# Altium PCB watch_1v1_connector_breakout.PcbDoc
Units mil, origin at the board's own origin, x right, y up, seen from the top; angles counter-clockwise.
Board outline 1050 x 445 mil, 2 copper layers (Top Layer, Bottom Layer); 4 components, 11 nets, 52 pads, 11 vias.
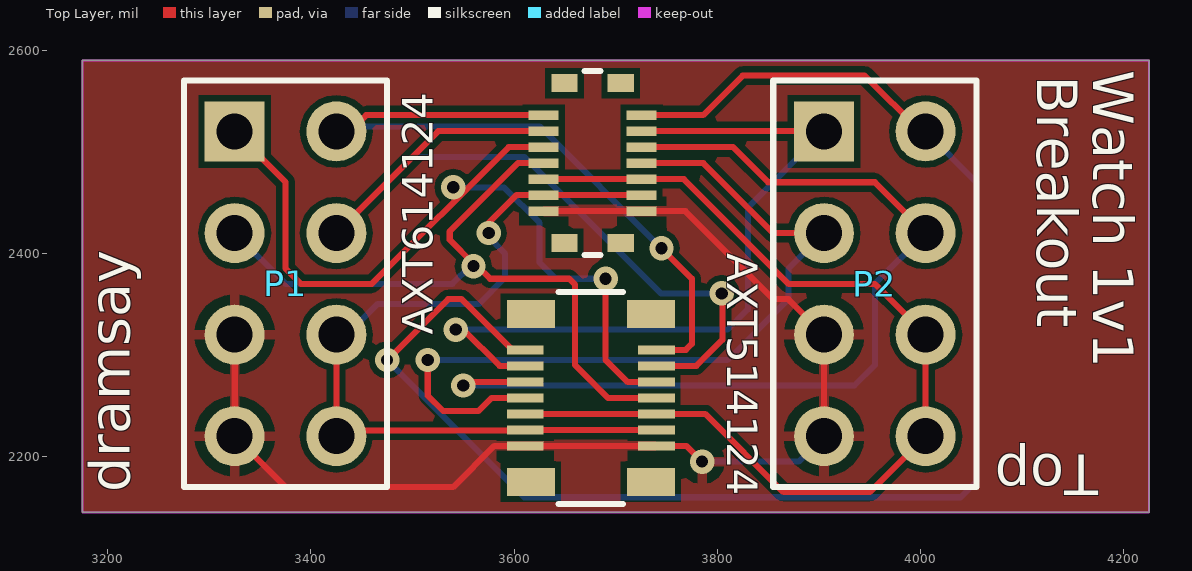
[diagram p0: Top Layer view]
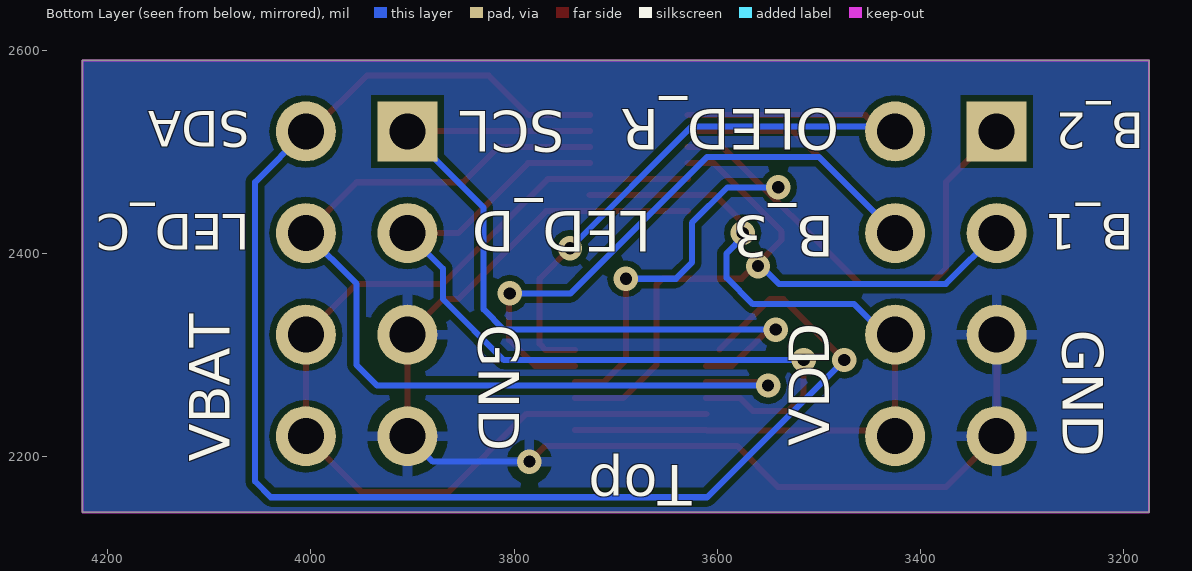
[diagram p1: Bottom Layer view, seen from below]

## Layer stack, top to bottom
Top Solder: solder mask 0.4, Solder Resist, Dk 3.5
Top Layer: signal copper 1.4
Dielectric 1: dielectric 12.6, FR-4, Dk 4.8
Bottom Layer: signal copper 1.4
Bottom Solder: solder mask 0.4, Solder Resist, Dk 3.5

## Board outline
4225,2590 3175,2590 3175,2145 4225,2145

## Design rules (kind name [scope] priority, off if disabled: settings)
Clearance [All] p1: gap=6 ignorepadtopadclearanceinfootprint=FALSE except(0: Arc-Hole Track-Hole SMDPad-Hole THPad-Hole Via-Hole Fill-Hole Poly-Hole Region-Hole Text-Hole)
PolygonConnect [All] p1: connectstyle=Relief reliefconductorwidth=10 reliefentries=4 polygonreliefangle="90 Angle" airgapwidth=10
RoutingVias [All] p1: holewidth=28 width=50 viastyle="Through Hole" minholewidth=28 minwidth=50 maxholewidth=28 maxwidth=50
SolderMaskExpansion [All] p1: expansion=4 istentingtop=FALSE
Width [All] p1: maxlimit=10 minlimit=6 preferedwidth=6 minimp=50.000000 maximp=50.000000 favimp=50.000000
30 further rules are at their usual default settings.

## Components (designator, comment, footprint, x,y, rotation, side; value= is the part's Value field where it differs from the comment)
AXT514124 "AXT514124" AXT514124 3675.43,2257.76 r270 top
AXT614124 "AXT614124" AXT614124 3677.32,2488.74 r90 top
P1 "Header 4X2" HDR2X4 3325,2520 r270 top
P2 "Header 4X2" HDR2X4 3905,2520 r270 top

## Footprints (in the part's own frame and the unit in brackets; to place one, negate y for a bottom-side part, rotate by r counter-clockwise, add the part's x,y. Pads: shape width x height; smd on the part's side, far side on the other; paste and mask are expansions set on the pad)
AXT514124 [mm]
  rect 0.23x0.92 smd: 1(-1.2,-1.64) 2(-1.2,1.64) 3(-0.8,-1.64) 4(-0.8,1.64) 5(-0.4,-1.64) 6(-0.4,1.64) 7(0,-1.64) 8(0,1.64) 9(0.4,-1.64) 10(0.4,1.64) 11(0.8,-1.64) 12(0.8,1.64) 13(1.2,-1.64) 14(1.2,1.64)
  rect 0.7x1.2 smd: MP1(-2.1,-1.5) MP2(-2.1,1.5) MP3(2.1,-1.5) MP4(2.1,1.5)
  silkscreen extent -2.65,-0.8 2.65,0.8, body extent -2.65,-2.08 2.65,2.08, height 1.27
AXT614124 [mm]
  rect 0.23x0.75 smd: 1(-1.2,-1.225) 2(-1.2,1.225) 3(-0.8,-1.225) 4(-0.8,1.225) 5(-0.4,-1.225) 6(-0.4,1.225) 7(0,-1.225) 8(0,1.225) 9(0.4,-1.225) 10(0.4,1.225) 11(0.8,-1.225) 12(0.8,1.225) 13(1.2,-1.225) 14(1.2,1.225)
  rect 0.45x0.655 smd: MP1(-2,-0.703) MP2(-2,0.703) MP3(2,-0.703) MP4(2,0.703)
  silkscreen extent -2.3,-0.2 2.3,0.2, body extent -2.3,-1.58 2.3,1.58, height 1.13
HDR2X4 [mm] "Connector; Header; 4x2 Position"
  rect 1.5x1.5 hole 0.9: 1(0,0)
  round 1.5 hole 0.9: 2(0,2.54) 3(2.54,0) 4(2.54,2.54) 5(5.08,0) 6(5.08,2.54) 7(7.62,0) 8(7.62,2.54)
  silkscreen extent -1.27,-1.27 8.89,3.81

## Part data
AXT514124: "Connector", Manufacturer_Name=Panasonic, Mouser Part Number=769-AXT514124, Datasheet Link=https://componentsearchengine.com/Datasheets/1/AXT514124.pdf, Height=1.17mm, Manufacturer_Part_Number=AXT514124, Mouser Price/Stock=https://www.mouser.com/Search/Refine.aspx?Keyword=769-AXT514124
AXT614124: "Connector", Manufacturer_Name=Panasonic, Mouser Part Number=769-AXT614124, Datasheet Link=https://componentsearchengine.com/Datasheets/1/AXT614124.pdf, Height=1.03mm, Manufacturer_Part_Number=AXT614124, Mouser Price/Stock=https://www.mouser.com/Search/Refine.aspx?Keyword=769-AXT614124
P1 P2: "Header, 4-Pin, Dual row", LatestRevisionDate=17-Jul-2002, LatestRevisionNote="Re-released for DXP Platform.", Publisher="Altium Limited"

## Via types
v1: diameter 24, hole 12, Top Layer to Bottom Layer, tented both sides, 11 vias

## Nets (pads, with @x,y where several pads share a name; then routed paths per layer and width w, separated by ;. In a path a pad name is that pad's centre, name@x,y a point inside that pad or via, vN(x,y) a via of type N, cw(c..) or ccw(c..) an arc to the next point about the centre after c; other vN are vias at no path point)
BTN1: AXT514124.8 AXT614124.8 P1.3 | length 707.1
  Top Layer w6: AXT614124.8 3603.74,2488.74 3536.64,2421.64 3536.64,2413.36 3560,2390 v1(3560,2387.5) 3563.79,2387.5 3576.29,2375 3654.14,2375 3660,2369.14 3660,2290 3692.24,2257.76 AXT514124.8
  Bottom Layer w6: P1.3 3375,2370 3539.32,2370 3556.82,2387.5 v1(3560,2387.5)
BTN2: AXT514124.6 AXT614124.10 P1.1 | length 820.8
  Top Layer w6: P1.1 3375,2470 3375,2385 3390,2370 3460,2370 3594.49,2504.49 AXT614124.10 ; v1(3690,2375) 3690,2295 3711.5,2273.5 AXT514124.6
  Bottom Layer w6: v1(3540,2465) 3590,2465 3625,2430 3625,2390.86 3640.86,2375 v1(3690,2375)
BTN3: AXT514124.4 AXT614124.12 P1.4 | length 833.3
  Top Layer w6: P1.4 3525.24,2520.24 AXT614124.12 ; AXT514124.4 3779.25,2289.25 3805,2315 3805,2360 v1(3804.38,2360.62)
  Bottom Layer w6: P1.4 3500,2495 3610,2495 3744.38,2360.62 v1(3804.38,2360.62)
GND: AXT514124.13 AXT514124.14 AXT614124.1 AXT614124.2 P1.5 P1.7 P2.5 P2.7 | length 1160.5
  Top Layer w6: P1.5 P1.7 3375,2170 3540,2170 3580.51,2210.51 AXT514124.13 AXT514124.14 3769.49,2210.51 v1(3785,2195) ; AXT614124.2 AXT614124.1 3768.5,2441.5 3855,2355 3870,2355 P2.5 P2.7
  Bottom Layer w6: v1(3785,2195) 3880,2195 P2.7
I2C_SCL: AXT514124.3 AXT614124.11 P2.1 | length 764.6
  Top Layer w6: v1(3542.5,2325) 3550,2325 3585.75,2289.25 AXT514124.3 ; AXT614124.11 3904.76,2520.24 P2.1
  Bottom Layer w6: v1(3542.5,2325) 3810,2325 3830,2345 3830,2445 P2.1
I2C_SDA: AXT514124.1 AXT614124.13 P2.2 | length 1494.1
  Top Layer w6: v1(3475,2295) 3535,2355 3548.23,2355 AXT514124.1@3597.76,2305.47 ; AXT614124.13 3785.98,2535.98 3825,2575 3945,2575 4000,2520 P2.2
  Bottom Layer w6: v1(3475,2295) 3610,2160 4039.54,2160 4055,2175.46 4055,2470 P2.2
LED_CLK: AXT514124.5 AXT614124.9 P2.4 | length 940.8
  Top Layer w6: v1(3550,2270) 3553.79,2270 3557.29,2273.5 AXT514124.5 ; AXT614124.9 3815.51,2504.49 3850,2470 3955,2470 P2.4
  Bottom Layer w6: v1(3550,2270) 3935,2270 3955,2290 3955,2370 P2.4
LED_DATA: AXT514124.7 AXT614124.7 P2.3 | length 809.6
  Top Layer w6: v1(3515,2295) 3515,2260 3530,2245 3565,2245 3577.76,2257.76 AXT514124.7 ; AXT614124.7 3786.26,2488.74 3855,2420 P2.3
  Bottom Layer w6: v1(3515,2295) 3810,2295 3870,2355 3870,2385 P2.3
OLED_RST: AXT514124.2 AXT614124.14 P1.2 | length 726.5
  Top Layer w6: P1.2 3438.27,2520 3454.26,2535.98 AXT614124.14 ; AXT514124.2 3769.14,2305 3775,2310.86 3775,2375 v1(3745,2405)
  Bottom Layer w6: P1.2 3430,2525 3625,2525 v1(3745,2405)
VBAT: AXT514124.9 AXT514124.10 AXT614124.5 AXT614124.6 P2.6 P2.8 | length 988.1
  Top Layer w6: AXT514124.9 AXT514124.10 3787.99,2242.01 3865,2165 3950,2165 P2.8 P2.6 3955,2370 3870,2370 3767.01,2472.99 AXT614124.5 AXT614124.6
VDD: AXT514124.11 AXT514124.12 AXT614124.3 AXT614124.4 P1.6 P1.8 | length 829.1
  Top Layer w6: P1.6 P1.8 3430.79,2225.79 3610.39,2225.79 AXT514124.11 AXT514124.12 ; v1(3575,2420) 3575,2430 3602.24,2457.24 AXT614124.4 AXT614124.3
  Bottom Layer w6: P1.6 3435.39,2320 3465.39,2350 3565,2350 3590.86,2375.86 3590.86,2400 3582,2408.86 3582,2409.21 3575,2416.21 v1(3575,2420)
pads on no net: AXT514124.MP1 AXT514124.MP2 AXT514124.MP3 AXT514124.MP4 AXT614124.MP1 AXT614124.MP2 AXT614124.MP3 AXT614124.MP4

## Polygon pours and split planes (outlines as drawn)
GND on Bottom Layer "bot gnd" (solid, pour order 0): 4225,2590 3175,2590 3175,2145 4225,2145
GND on Top Layer "top gnd" (solid, pour order 1): 4225,2590 3175,2590 3175,2145 4225,2145

## Keep-outs
Keep-Out Layer:
  the board outline again, w2

## Silkscreen, mask and mechanical layers (free items; w line width, h text height)
Top Overlay:
  text "Watch 1v1" at 4170,2580 h40 r270
  text "Breakout" at 4115,2575 h40 r270
  text "Top" at 4175,2201.67 h40 r180
  text "dramsay" at 3221.67,2165 h40 r90
Bottom Overlay:
  text "OLED_R" at 3480,2541.67 h40 r180
  text "SCL" at 3750,2540 h40 r180
  text "SDA" at 4060,2540 h35 r180
  text "B_2" at 3180,2538.34 h35 r180
  text "LED_D" at 3665,2441.67 h40 r180
  text "B_1" at 3190,2438.34 h35 r180
  text "LED_C" at 4060,2438.34 h35 r180
  text "B_3" at 3485,2436.67 h40 r180
  text "GND" at 3835,2330 h40 r90
  text "GND" at 3260,2325 h40 r90
  text "VDD" at 3490,2210 h40 r270
  text "VBAT" at 4080,2195 h40 r270
  text "Top" at 3625,2191.67 h40 r180